# Altium PCB PCB_ASA.PcbDoc
Units mil, origin at the board's own origin, x right, y up, seen from the top; angles counter-clockwise.
Board outline 3897.64 x 3857.88 mil, 2 copper layers (Top Layer, Bottom Layer), stack 65.792 mil thick; 59 components, 102 nets, 331 pads, 160 vias.
Unrouted connection lines stored in the file: 1.
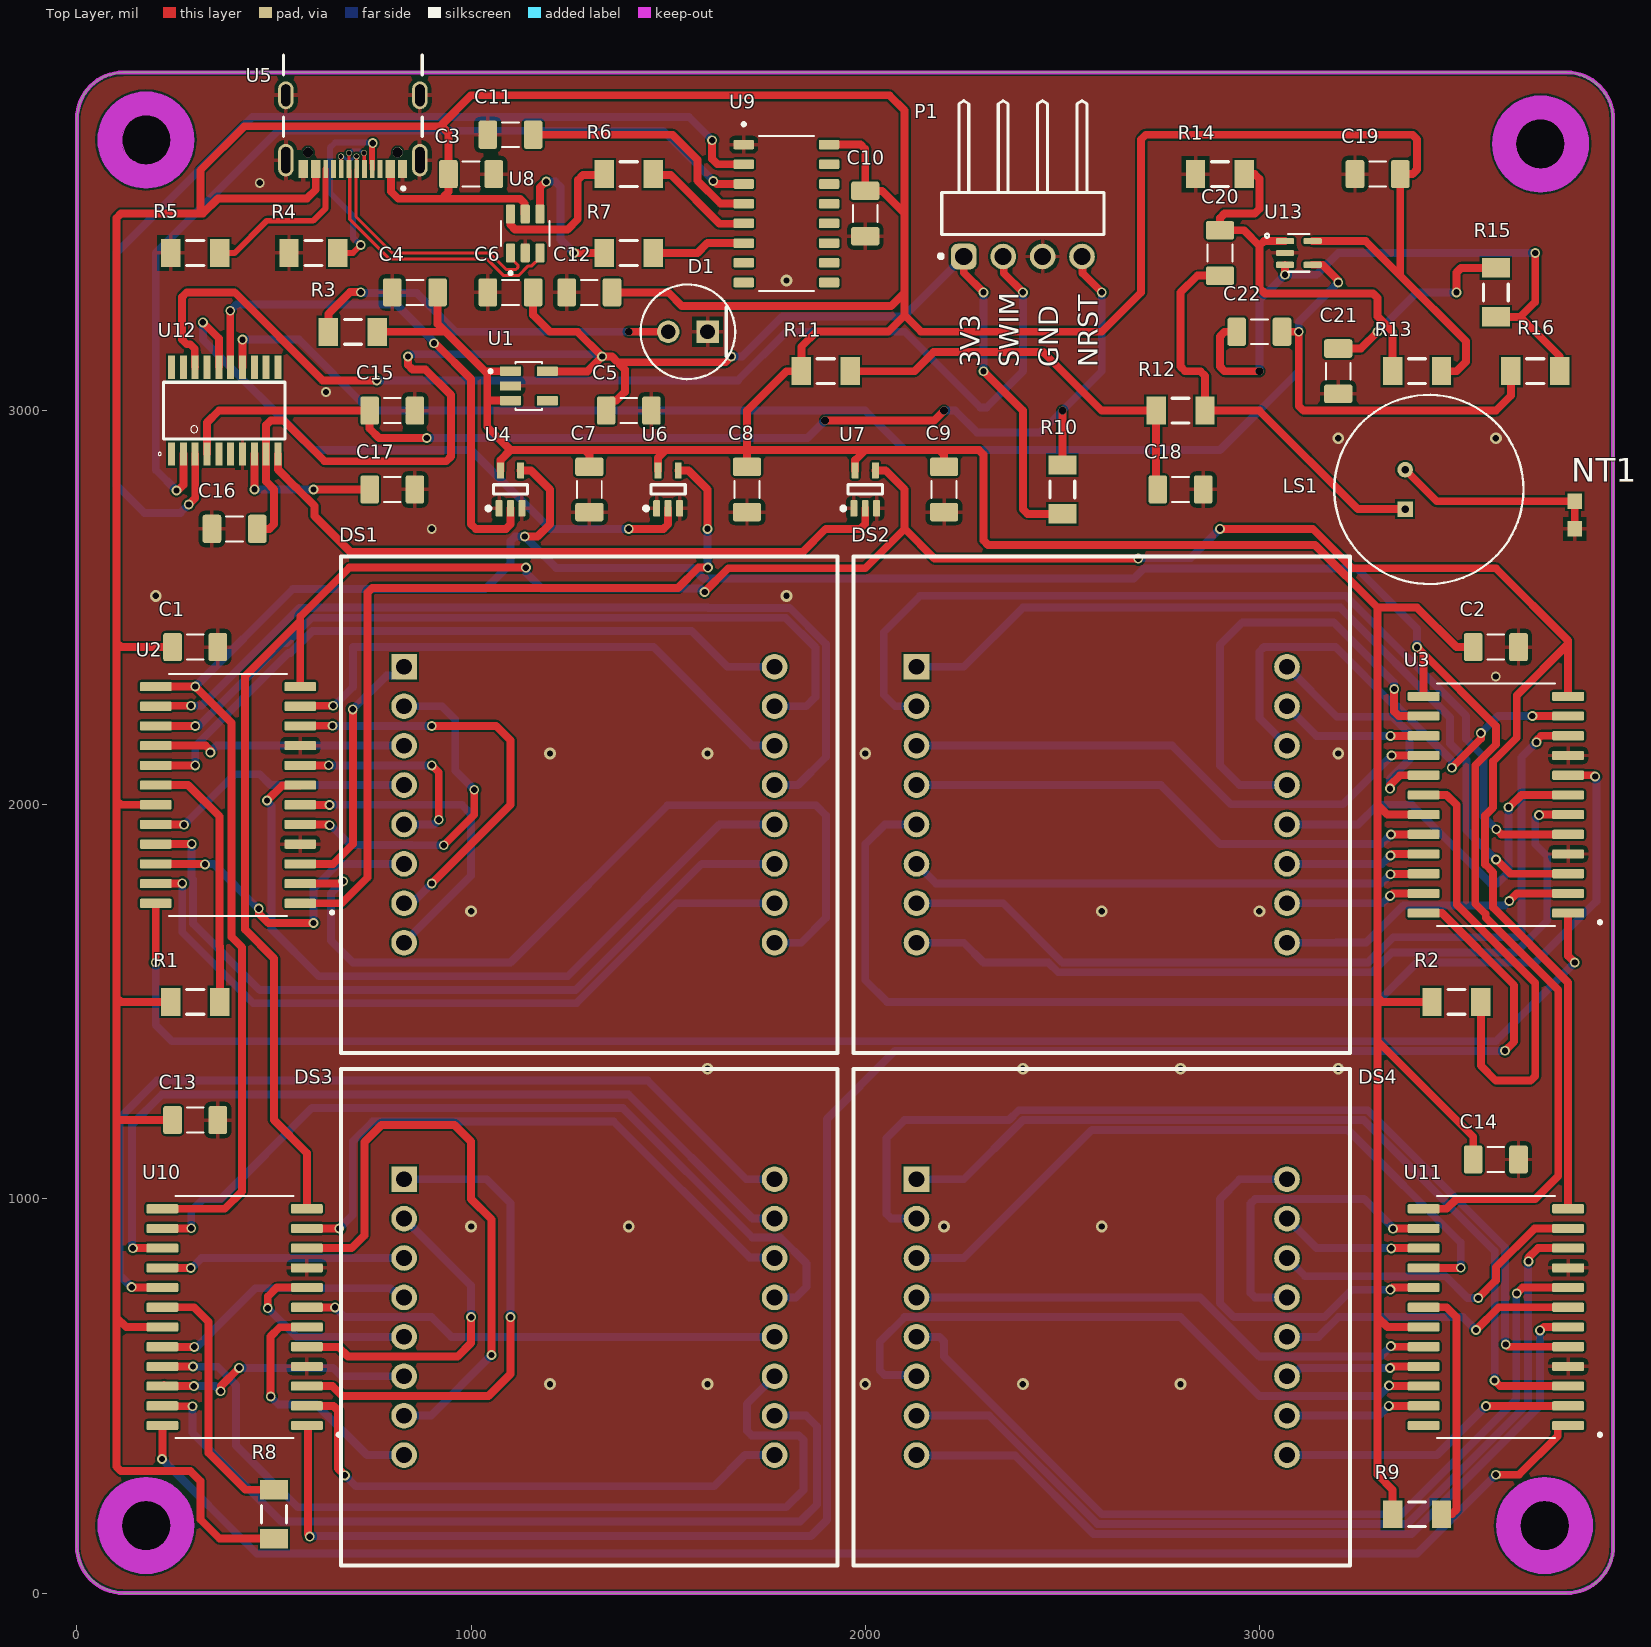
[diagram p0: Top Layer view]
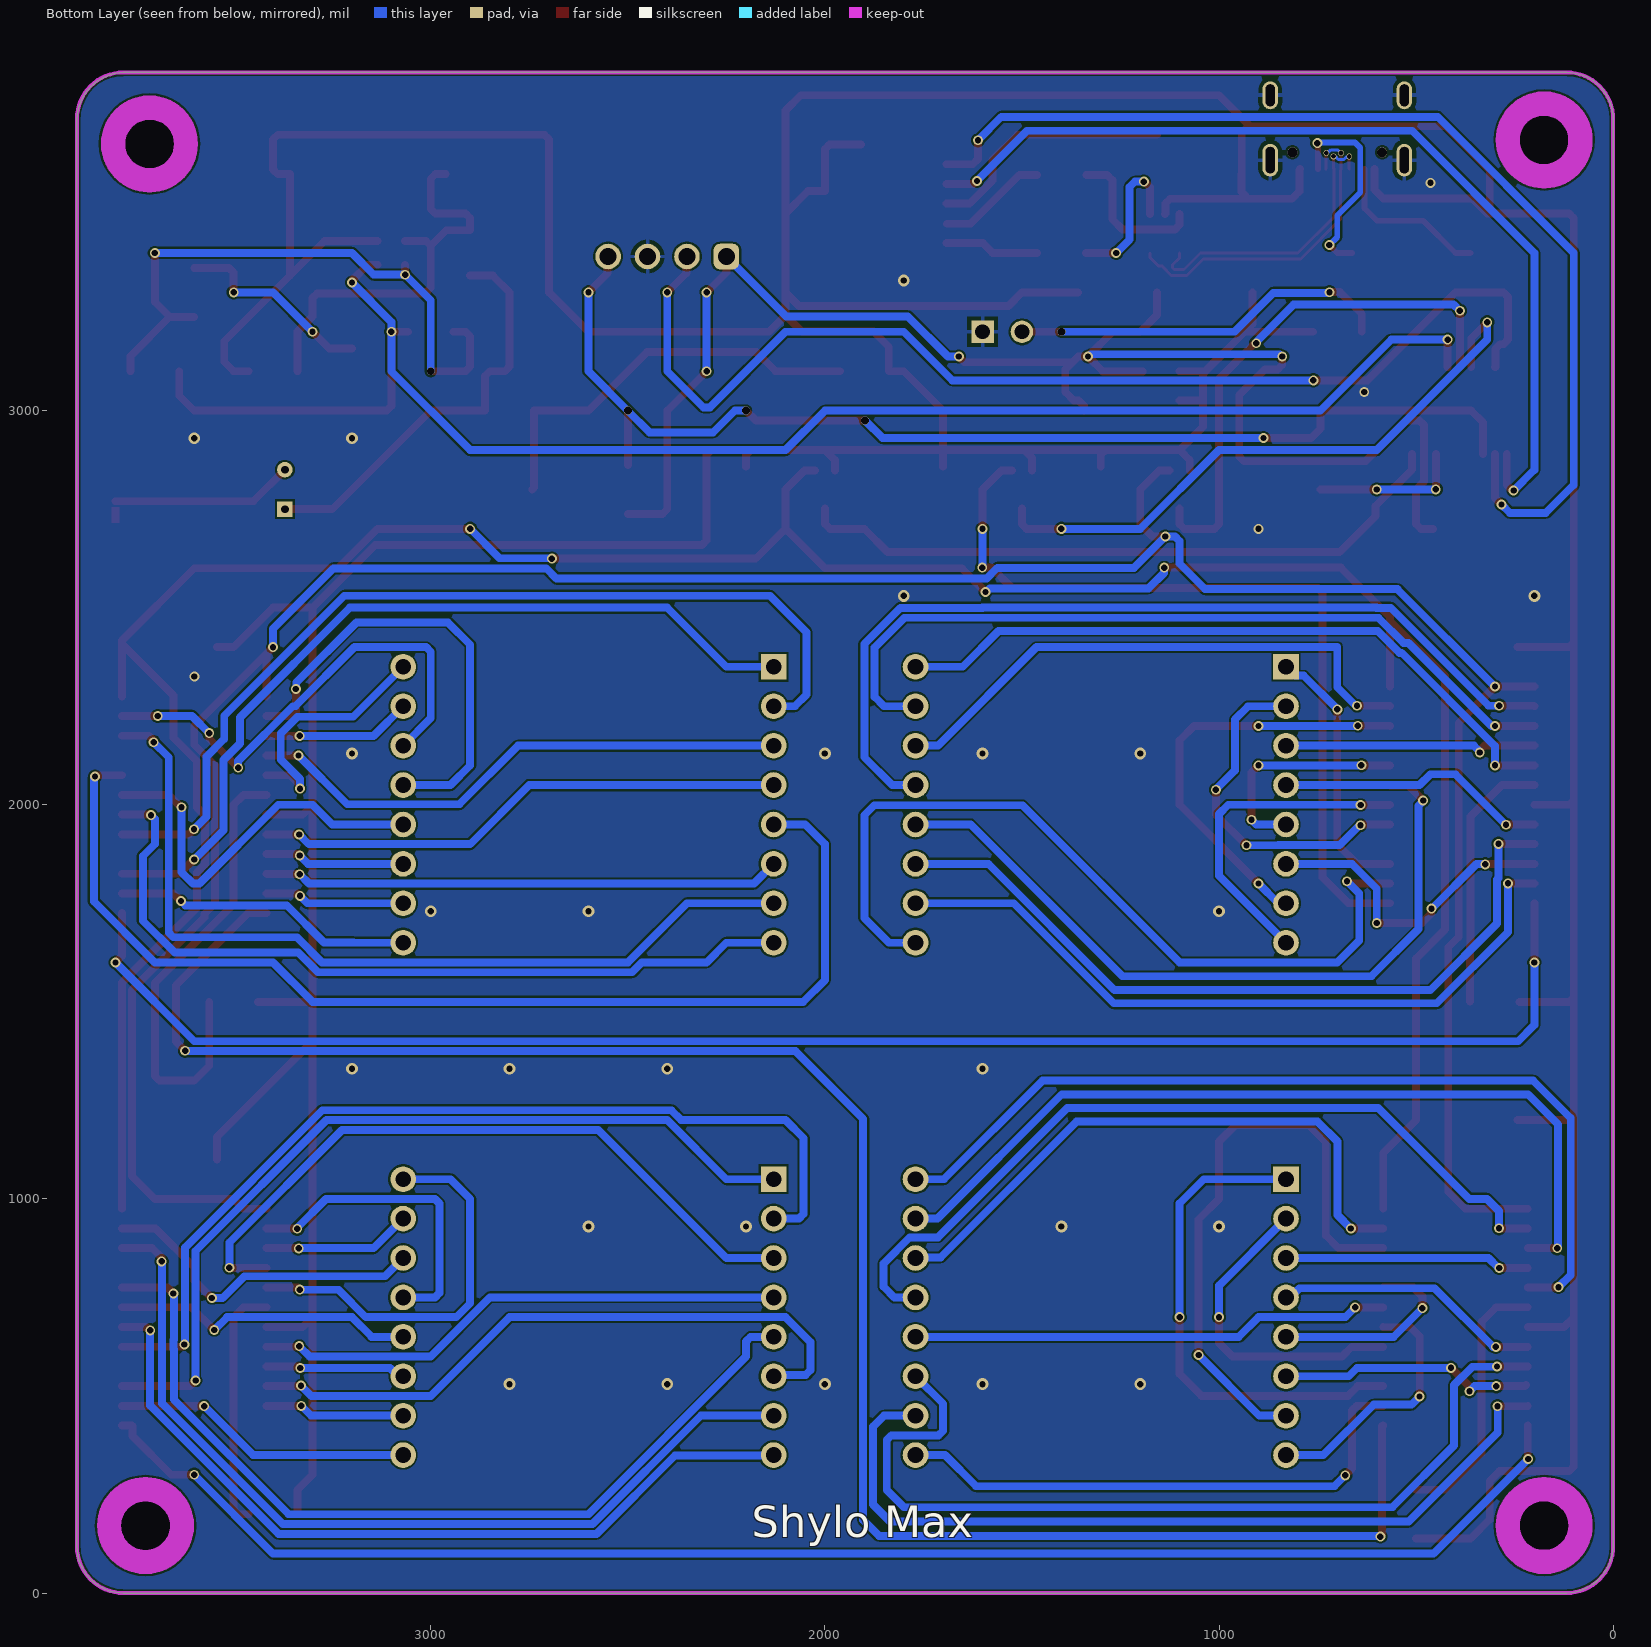
[diagram p1: Bottom Layer view, seen from below]
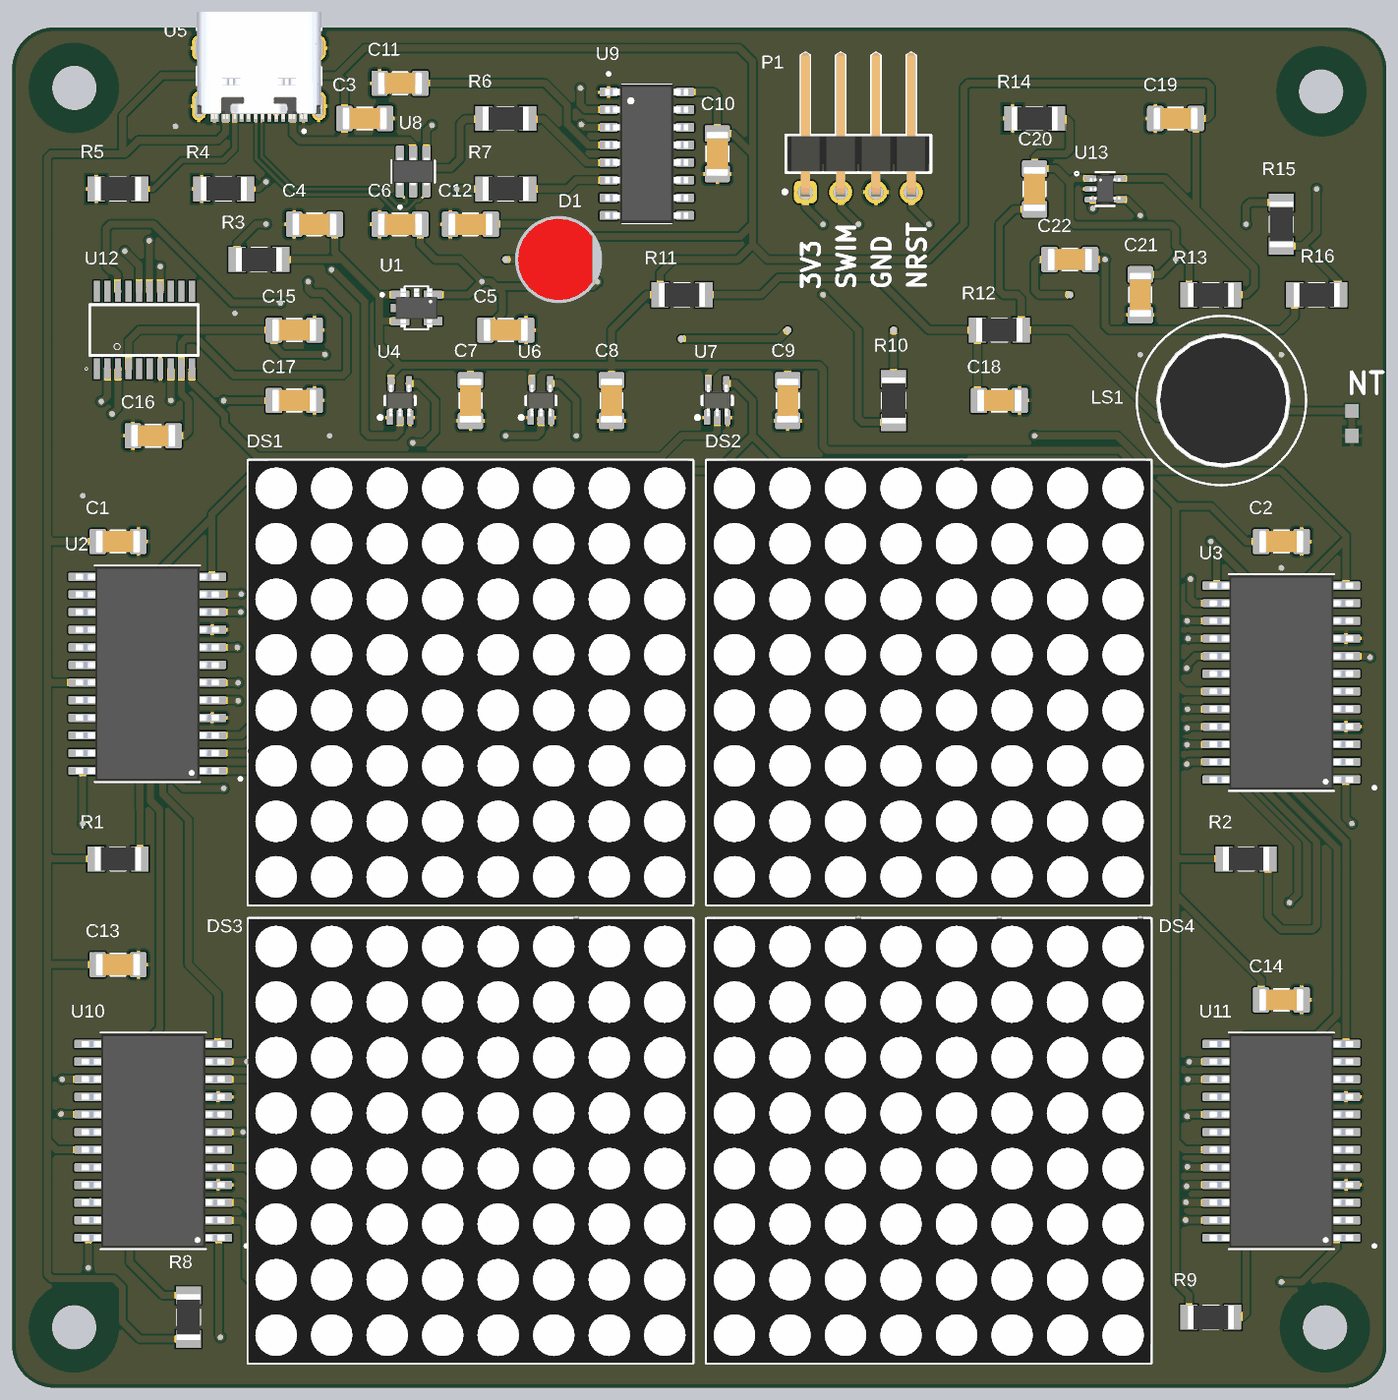
[diagram p2: 3D render of the assembled board from above, using the file's embedded part models]

## Layer stack, top to bottom
Top Solder: solder mask 0.0102, Solder Resist, Dk 3.5
Top Layer: signal copper 1.4
Dielectric 1: dielectric 62.9921, FR-4, Dk 4.8
Bottom Layer: signal copper 1.4
Bottom Solder: solder mask 0.0102, Solder Resist, Dk 3.5

## Board outline
0,118.11 0,3739.77 cw(c118.11,3739.77) 118.11,3857.88 3779.53,3857.88 cw(c3776.58,3736.82) 3897.64,3739.77 3897.64,118.11 cw(c3779.55,118.09) 3779.53,0 118.11,0 cw(c121.06,121.06)
cut-out: 3660.9,170.8 ccw(c3723.89,170.8) 3723.89,107.81 ccw(c3723.89,170.8) 3786.89,170.8 ccw(c3723.89,170.8) 3723.89,233.8 ccw(c3723.89,170.8)
cut-out: 113.44,3686.63 ccw(c176.43,3686.63) 176.43,3623.63 ccw(c176.43,3686.63) 239.42,3686.63 ccw(c176.43,3686.63) 176.43,3749.62 ccw(c176.43,3686.63)
cut-out: 112.9,171.2 ccw(c175.89,171.2) 175.89,108.21 ccw(c175.89,171.2) 238.89,171.2 ccw(c175.89,171.2) 175.89,234.19 ccw(c175.89,171.2)
cut-out: 3649.55,3676.46 ccw(c3712.54,3676.46) 3712.54,3613.47 ccw(c3712.54,3676.46) 3775.53,3676.46 ccw(c3712.54,3676.46) 3712.54,3739.45 ccw(c3712.54,3676.46)

## Design rules (kind name [scope] priority, off if disabled: settings)
Clearance [All] p1: gap=5 ignorepadtopadclearanceinfootprint=FALSE
DiffPairsRouting DiffPairsRouting_1 [All] p1: maxlimit=7.87 minlimit=7.87 mostfreqgap=7.87 toplayer_minwidth=7.87 toplayer_maxwidth=7.87 toplayer_prefwidth=7.87 bottomlayer_minwidth=7.87 bottomlayer_maxwidth=7.87 bottomlayer_prefwidth=7.87 maxuncoupledlength=500
HoleSize [All] p1: absolutevalues=TRUE maxlimit=200 minlimit=1 maxpercent=80.000 minpercent=20.000
HoleToHoleClearance [All] p1: gap=1 allowstackedmicrovias=TRUE
MinimumSolderMaskSliver [All] p1: minsoldermaskwidth=1
PolygonConnect PolygonConnect_GND [IsVia AND NOT IsComponent] p1: connectstyle=Direct reliefconductorwidth=10 reliefentries=4 polygonreliefangle="90 Angle" airgapwidth=10
PolygonConnect PolygonConnect_1 [All] p2: connectstyle=Relief reliefconductorwidth=10 reliefentries=4 polygonreliefangle="90 Angle" airgapwidth=10
RoutingVias [All] p1: holewidth=20 width=20 viastyle="Through Hole" minholewidth=10 minwidth=10 maxholewidth=50 maxwidth=50
SilkToSolderMaskClearance [IsPad] p1: minsilkscreentomaskgap=1 clearancetoexposedcopper=TRUE
SolderMaskExpansion [All] p1: expansion=4 istentingtop=FALSE
SupplyNets "Schematic Supply Nets" [InNet('GNDA')] p1: voltage=0.000
SupplyNets "Schematic Supply Nets_3" [InNet('5V')] p2: voltage=0.000
SupplyNets "Schematic Supply Nets_2" [InNet('GND')] p3: voltage=0.000
SupplyNets "Schematic Supply Nets_1" [InNet('3V3')] p4: voltage=0.000
Width [All] p1: maxlimit=100 minlimit=10 preferedwidth=50 minimp=50.000000 maximp=50.000000 favimp=50.000000
25 further rules are at their usual default settings.

## Classes and differential pairs
differential pair D: +D_P -D_N

## Components (designator, comment, footprint, x,y, rotation, side; value= is the part's Value field where it differs from the comment)
C1 "Cap_1206" Cap_1206 300,2400 r180 top value=100n
C2 "Cap_1206" Cap_1206 3600,2400 r180 top value=100n
C3 "Cap_1206" Cap_1206 1000,3600 r180 top value=10u
C4 "Cap_1206" Cap_1206 857.48,3300 r0 top value=1u
C5 "Cap_1206" Cap_1206 1400,3000 r180 top value=10u
C6 "Cap_1206" Cap_1206 1100,3300 r0 top value=1u
C7 "Cap_1206" Cap_1206 1300,2800 r270 top value=100n
C8 "Cap_1206" Cap_1206 1700,2800 r270 top value=100n
C9 "Cap_1206" Cap_1206 2200,2800 r270 top value=100n
C10 "Cap_1206" Cap_1206 2000,3500 r90 top value=100n
C11 "Cap_1206" Cap_1206 1100,3700 r180 top value=100n
C12 "Cap_1206" Cap_1206 1300,3300 r0 top value=100n
C13 "Cap_1206" Cap_1206 300,1200 r180 top value=100n
C14 "Cap_1206" Cap_1206 3600,1100 r180 top value=100n
C15 "Cap_1206" Cap_1206 800,3000 r180 top value=1u
C16 "1u" Cap_1206 400,2700 r0 top
C17 "Cap_1206" Cap_1206 800,2800 r0 top value=2.2u
C18 "Cap_1206" Cap_1206 2800,2800 r180 top value=100n
C19 "Cap_1206" Cap_1206 3300,3600 r180 top value=100n
C20 "Cap_1206" Cap_1206 2900,3400 r270 top value=10n
C21 "Cap_1206" Cap_1206 3200,3100 r270 top value=1u
C22 "Cap_1206" Cap_1206 3000,3200 r180 top value=100p
D1 "Led_Red" Led_Red 1550,3200 r180 top
DS1 "1088AS" LED_MATRIX_8x8_1088AS 1300,2000 r0 top
DS2 "1088AS" LED_MATRIX_8x8_1088AS 2600,2000 r0 top
DS3 "1088AS" LED_MATRIX_8x8_1088AS 1300,700 r0 top
DS4 "1088AS" LED_MATRIX_8x8_1088AS 2600,700 r0 top
LS1 "Micro" Micro 3400,2800 r90 top
NT1 "NETTIE_SMD" NETTIE_SMD 3800,2735 r90 top net-tie
P1 "61300411021" 61300411021 2400,3500 r180 top
R1 "Res_1206" Res_1206 300,1500 r0 top value=10k
R2 "Res_1206" Res_1206 3500,1500 r0 top value=10k
R3 "Res_1206" Res_1206 700,3200 r180 top value=2k
R4 "Res_1206" Res_1206 600,3400 r0 top value=5.1k
R5 "Res_1206" Res_1206 300,3400 r0 top value=5.1k
R6 "Res_1206" Res_1206 1400,3600 r0 top value=22
R7 "Res_1206" Res_1206 1400,3400 r0 top value=22
R8 "Res_1206" Res_1206 500,200 r90 top value=10k
R9 "Res_1206" Res_1206 3400,200 r0 top value=10k
R10 "Res_1206" Res_1206 2500,2800 r270 top value=10k
R11 "Res_1206" Res_1206 1900,3100 r0 top value=2k
R12 "Res_1206" Res_1206 2800,3000 r0 top value=2k
R13 "Res_1206" Res_1206 3400,3100 r180 top value=1M
R14 "Res_1206" Res_1206 2900,3600 r180 top value=1M
R15 "Res_1206" Res_1206 3600,3300 r90 top value=10k
R16 "Res_1206" Res_1206 3700,3100 r180 top value=100k
U1 "AP2112K-3.3TRG1" AP2112K-3.3TRG1 1146.65,3062.6 r0 top
U2 "MAX7219" MAX7219 383.27,2025 r180 top
U3 "MAX7219" MAX7219 3600,2000 r180 top
U4 "CAHCT1G125QDCKRG4Q" DCK0005A_M 1100,2800 r90 top
U5 "USB Type C" "USB Type C" 700,3800 r180 top
U6 "CAHCT1G125QDCKRG4Q" DCK0005A_M 1500,2800 r90 top
U7 "CAHCT1G125QDCKRG4Q" DCK0005A_M 2000,2800 r90 top
U8 "ESD USBLC6-2SC6" "ESD USBLC6-2SC6" 1137.4,3449.41 r90 top
U9 "CH340C" CH340C 1800,3500 r0 top
U10 "MAX7219" MAX7219 400,700 r180 top
U11 "MAX7219" MAX7219 3600,700 r180 top
U12 "STM8S103F3P6" STM8S103F3P6 400,3000 r90 top
U13 "MAX4466" MAX4466 3100,3400 r0 top

## Footprints (in the part's own frame and the unit in brackets; to place one, negate y for a bottom-side part, rotate by r counter-clockwise, add the part's x,y. Pads: shape width x height; smd on the part's side, far side on the other; paste and mask are expansions set on the pad)
61300411021 [mm] "Pin Header, pitch 2.54 mm, THT, Angled, single row, 4p"
  rrect50% 1.65x1.65 hole 1.1: 1(3.81,2.77)
  round 1.65 hole 1.1: 2(1.27,2.77) 3(-1.27,2.77) 4(-3.81,2.77)
  silkscreen extent -5.23,-7.27 5.41,2.87, body extent -5.08,-7.27 5.08,3.09, height 2.58
AP2112K-3.3TRG1 [mm]
  rrect15% 1.35x0.6 smd: 1(-1.185,0.95) 2(-1.185,0) 3(-1.185,-0.95) 4(1.185,-0.95) 5(1.185,0.95)
  silkscreen extent -2.57,-1.55 0.85,1.55, body extent -1.5,-1.4 1.5,1.4, height 1.4
Cap_1206 [mm]
  rrect25% 1.2x1.82 smd: 1(-1.46,0) 2(1.46,0)
  silkscreen extent -0.54,-0.8 0.54,0.8, body extent -1.6,-0.8 1.6,0.8, height 1.8
CH340C [mm]
  rrect25% 1.31x0.62 smd: 1(-2.75,4.445) 2(-2.75,3.175) 3(-2.75,1.905) 4(-2.75,0.635) 5(-2.75,-0.635) 6(-2.75,-1.905) 7(-2.75,-3.175) 8(-2.75,-4.445) 9(2.75,-4.445) 10(2.75,-3.175) 11(2.75,-1.905) 12(2.75,-0.635) 13(2.75,0.635) 14(2.75,1.905) 15(2.75,3.175) 16(2.75,4.445)
  silkscreen extent -2.85,-5 1.78,5.85, body extent -3,-5 3,5, height 1.8
DCK0005A_M [mm] "SOT23, 5-Leads, Body 2.15x1.4mm, Pitch 0.65mm, IPC Low Density"
  rrect22% 1.05x0.45 smd: 1(-1.219,0.737) 2(-1.219,0) 3(-1.219,-0.737) 4(1.225,-0.65) 5(1.225,0.65)
  silkscreen extent -1.35,-1.1 0.3,1.55, body extent -1.14,-1 1.14,1, height 0.94
"ESD USBLC6-2SC6" [mm]
  rrect25% 1.21x0.59 smd: 1(-1.255,0.95) 2(-1.255,0) 3(-1.255,-0.95) 4(1.255,-0.95) 5(1.255,0) 6(1.255,0.95)
  silkscreen extent -2.65,-1.57 0.81,1.57, body extent -1.4,-1.46 1.4,1.46, height 0.4
LED_MATRIX_8x8_1088AS [mil]
  rect 65x65 hole 40: 1(-470,350)
  round 65 hole 40: 2(-470,250) 3(-470,150) 4(-470,50) 5(-470,-50) 6(-470,-150) 7(-470,-250) 8(-470,-350) 9(470,-350) 10(470,-250) 11(470,-150) 12(470,-50) 13(470,50) 14(470,150) 15(470,250) 16(470,350)
  silkscreen extent -630,-630 630,630, body extent -630,-630 630,630, height 315
Led_Red [mm]
  rect 1.45x1.45 hole 0.95 paste-2539.97 mask+0: 1(-1.27,0)
  round 1.45 hole 0.95 paste-2539.97 mask+0: 2(1.27,0)
  silkscreen extent -3.05,-3.05 3.05,3.05, body extent -3.15,-3.15 3.15,3.15, height 0.25
MAX4466 [mm]
  rrect50% 1.19x0.4 smd: 1(-0.889,0.762) 2(-0.889,0) 3(-0.889,-0.762) 4(0.889,-0.762) 5(0.889,0.762)
  silkscreen extent -2.17,-1.22 0.68,1.24, body extent -1.1,-1 1.1,1, height 1.1
MAX7219 [mm]
  rrect25% 2.05x0.59 smd: 1(-4.655,6.985) 2(-4.655,5.715) 3(-4.655,4.445) 4(-4.655,3.175) 5(-4.655,1.905) 6(-4.655,0.635) 7(-4.655,-0.635) 8(-4.655,-1.905) 9(-4.655,-3.175) 10(-4.655,-4.445) 11(-4.655,-5.715) 12(-4.655,-6.985) 13(4.655,-6.985) 14(4.655,-5.715) 15(4.655,-4.445) 16(4.655,-3.175) 17(4.655,-1.905) 18(4.655,-0.635) 19(4.655,0.635) 20(4.655,1.905) 21(4.655,3.175) 22(4.655,4.445) 23(4.655,5.715) 24(4.655,6.985)
  silkscreen extent -6.81,-7.8 3.8,7.8, body extent -5.16,-7.7 5.16,7.7, height 2.65
Micro [mm]
  rect 1x1 hole 0.5 paste-2539.97 mask+0: 1(-1.27,0.762)
  round 1 hole 0.5 paste-2539.97 mask+0: 2(1.27,0.762)
  silkscreen extent -6.1,-6.86 6.1,5.33, body extent -4.85,-5.74 4.85,3.96, height 5.18
NETTIE_SMD [mil]
  rect 39.37x37.49 smd paste+0 mask+0: 1(-35,0) 2(35,0)
  Top Layer region: -20,-10 20,-10 20,10 -20,10
Res_1206 [mm] "Chip Resistor, 2-Leads, Body 3,20x1,60mm, IPC Low Density"
  rect 1.25x1.8 smd: 1(-1.575,0) 2(1.575,0)
  silkscreen extent -0.55,-0.8 0.55,0.8, body extent -1.65,-0.85 1.65,0.85, height 0.65
STM8S103F3P6 [mm]
  rect 1.5x0.45 smd: 1(-2.794,4.064) 2(-2.794,3.302) 3(-2.794,2.54) 4(-2.794,1.778) 5(-2.794,1.016) 6(-2.794,0.254) 7(-2.794,-0.508) 8(-2.794,-1.27) 9(-2.794,-2.032) 10(-2.794,-2.794) 11(2.794,-2.794) 12(2.794,-2.032) 13(2.794,-1.27) 14(2.794,-0.508) 15(2.794,0.254) 16(2.794,1.016) 17(2.794,1.778) 18(2.794,2.54) 19(2.794,3.302) 20(2.794,4.064)
  silkscreen extent -2.89,-3.25 1.82,4.93, body extent -3.2,-3.25 3.2,4.57, height 0.25
"USB Type C" [mm]
  rect 0.6x1.15 smd mask+0.047: A1_B12(-3.2,4.755) B1_A12(3.2,4.755)
  rect 0.6x1.15 smd mask+0.05: A4_B9(-2.4,4.755) B4_A9(2.4,4.755)
  rect 0.3x1.15 smd mask+0.05: A5(-1.25,4.755) A6(-0.25,4.755) A7(0.25,4.755) A8(1.25,4.755) B5(1.75,4.755) B6(0.75,4.755) B7(-0.75,4.755) B8(-1.75,4.755)
  oval 1x2.1 hole 0.6 slot 1.7 at 90 deg: SH1(-4.32,4.18) SH2(4.32,4.18)
  oval 1x1.8 hole 0.6 slot 1.4 at 90 deg: SH3(-4.32,0) SH4(4.32,0)
  round 0.65 hole 0.65 unplated: ""(-2.89,3.68) ""(2.89,3.68)
  silkscreen extent -4.47,-2.6 4.47,6.1, body extent -4.47,-2.6 4.47,5.11, height 3.31

## Part data
C16: library part Cap_1206
P1: library part CMP-1502-01063-4, "THT Angled Pin Header WR-PHD, Pitch 2.54 mm, Single Row, 4 pins", Color=Black, Contact Resistance=20mΩ, Current Rating=3A, Operating Supply Voltage=250V, Connector Type="Male Pin", Contact Material=Copper, Contact Mating Length=5.9944mm, Contact Plating=Gold, Gender=Male, Lead Pitch=2.54mm, Mount="Through Hole", Number of Contacts=4, Number of Pins=4, Number of Positions=4, Number of Rows=1, Pitch=2.54mm, RoHS=Compliant, Termination=Solder
U4 U6 U7: library part CMP-0859-00347-3, F @ Nom Voltage(Max)(Mhz)=75, Generic Part Number=SN74AHCT1G125-Q1, ICC @ Nom Voltage(Max)(mA)=0.01, Manufacturer="Texas Instruments", Operating Temperature Range(C)="-40 to 125", Rating=Automotive, tpd @ Nom Voltage(Max)(ns)=6, Voltage(Nom)(V)=5, 3-State Output=Yes, Bits(#)=1, DatasheetVersion=SCLS504B, Input Type=CMOS, Logic=True, Output Drive (IOL/IOH)(Max)(mA)=8/-8, Output Type=CMOS, PackageReference=DCK0005A, Schmitt Trigger=No, Sub-Family="Non-Inverting Buffer/Driver", Technology Family=AHCT, VCC(Max)(V)=5.5, VCC(Min)(V)=3

## Via types
v1: diameter 25, hole 16, Top Layer to Bottom Layer, tented both sides, 126 vias
v2: diameter 30, hole 16, Top Layer to Bottom Layer, tented both sides, 25 vias
v3: diameter 20, hole 20, Top Layer to Bottom Layer, 5 vias
v4: diameter 15, hole 12, Top Layer to Bottom Layer, tented both sides, 4 vias

## Nets (pads, with @x,y where several pads share a name; then routed paths per layer and width w, separated by ;. In a path a pad name is that pad's centre, name@x,y a point inside that pad or via, vN(x,y) a via of type N, cw(c..) or ccw(c..) an arc to the next point about the centre after c; other vN are vias at no path point)
3V3: C5.2 C6.2 C16.2 P1.1 R10.2 U1.5 U12.9 | length 4075.1
  Top Layer w20: C16.2 488.28,2700 500,2711.72 500,2800 480,2820 U12.9 480,2963.28 491.72,2975 525,2975 628.36,2871.64 937.06,2871.64 948.78,2883.36 948.78,3039.63 883.93,3104.48 851.21,3104.48 839.5,3116.2 839.5,3137.09 v1(839.72,3137.32) ; C6.2 1157.48,3242.52 1200,3200 1269.5,3200 v1(1332.42,3137.07) ; U1.5@1193.69,3099.62 1294.97,3099.62 v1(1332.42,3137.07) ; C5.2 1342.52,3012.2 1356.14,3025.83 1368.35,3025.83 1390.15,3047.63 1390.15,3104.19 1371.55,3122.79 ; v1(1660.18,3137.07) 1645.9,3122.79 1371.55,3122.79 ; P1.1 2250,3350 v1(2300,3300) ; v1(2300,3100) 2400,3000 2400,2749.71 2411.72,2737.99 R10.2 ; v1(1332.42,3137.07) 1357.27,3137.07 1371.55,3122.79
  Bottom Layer w20: v1(839.72,3137.32) 841.08,3137.32 846.9,3143.14 1325,3143.14 1331.07,3137.07 v1(1332.42,3137.07) ; v1(1660.18,3137.07) 1687.82,3137.07 1789.71,3238.96 2098.01,3238.96 P1.1 ; v1(2300,3100) v1(2300,3300)
5V: C1.2 C2.2 C3.2 C4.2 C7.1 C8.1 C9.1 C10.2 C12.2 C13.2 C14.2 C19.1 R1.1 R2.1 R3.1 R8.1 R9.1 R11.1 R13.1 U1.1 U1.3 U2.19 U3.19 U4.5 U5.A4_B9 U5.B4_A9 U6.5 U7.5 U8.5 U9.16 U10.19 U11.19 U13.5 | length 19573.9
  Top Layer w20: U2.19 111.72,2000 100,2011.72 ; U10.19 125,675 100,700 ; R1.1 111.72,1500 100,1511.72 ; C13.2 100,1200 ; C1.2 111.72,2400 100,2411.72 ; R8.1 362.01,137.99 313.03,186.97 313.03,284.43 288.28,309.17 111.72,309.17 100,320.89 100,700 ; U5.B4_A9@605.76,3612.55 605.76,3560.69 583.27,3538.2 357.66,3538.2 319.46,3500 313.12,3500 ; R3.1 935.01,3200 ; U5.A4_B9 796.3,3610.98 796.3,3556.31 815.11,3537.51 929.32,3537.51 ; C4.2 914.96,3220.05 935.01,3200 ; 931.32,3537.51 1083.74,3537.51 1083.87,3537.64 1123.94,3537.64 1135.79,3525.79 1135.79,3500.43 U8.5 ; 935.48,3539.51 931.32,3543.67 943.03,3555.38 C3.2@943.03,3599.49 ; C3.2 942.52,3704.25 923.38,3723.38 ; U4.5 1074.41,2874.41 1100,2900 ; U1.3 1045.29,3025.2 1040.96,3029.52 ; U1.1 1040.96,3100 1040.96,3094.04 ; C7.1 1300,2888.28 1288.28,2900 ; C12.2 1500,3300 1534.33,3265.67 2065.67,3265.67 2100,3300 ; U6.5 1474.41,2880.27 1494.14,2900 ; C8.1 1700,2900 ; U9.16 1988.28,3675 2000,3663.28 C10.2 2042.52,3557.48 2100,3500 ; U7.5 1974.41,2874.41 2000,2900 ; C9.1 2200,2888.28 2188.28,2900 ; U13.5 3270,3430 3357.48,3342.52 ; R9.1 3337.99,262.01 3300,300 3300,700 ; U11.19 3325,675 3300,700 ; U3.19 3325,1975 3300,2000 ; R2.1 3311.72,1500 3300,1511.72 ; R13.1 3500,3100 3524.02,3124.02 3524.02,3175.98 3357.48,3342.52 ; C14.2 3542.52,1157.48 3300,1400 ; C2.2 3500,2400 3400,2500 3300,2500 ; 100,700 100,1200 ; 100,1200 100,1511.72 ; 100,1511.72 100,2011.72 ; 100,2011.72 100,2411.72 ; 100,2411.72 100,3488.28 111.72,3500 313.12,3500 ; 313.12,3500 313.12,3609.51 425.03,3721.42 921.42,3721.42 923.38,3723.38 ; 923.38,3723.38 1000,3800 2061.26,3800 2100,3761.26 2100,3500 ; 935.01,3200 1040.96,3094.04 ; 1040.96,3029.52 1040.96,3094.04 ; 1040.96,3029.52 1040.96,2959.04 1100,2900 ; 1100,2900 1288.28,2900 ; 1288.28,2900 1494.14,2900 ; 1494.14,2900 1700,2900 ; 1700,2900 1700,3000 1800,3100 R11.1 1837.99,3162.01 1876.24,3200.26 2058.37,3200.26 2100,3241.89 ; 1700,2900 2000,2900 ; 2000,2900 2188.28,2900 ; 2100,3241.89 2141.89,3200 2600,3200 2700,3300 2700,3688.28 2711.72,3700 3388.28,3700 3400,3688.28 3400,3611.72 3388.28,3600 C19.1 3357.48,3342.52 ; 2100,3241.89 2100,3300 ; 2100,3300 2100,3500 ; 2188.28,2900 2288.28,2900 2300,2888.28 2300,2670.87 2311.72,2659.16 3140.84,2659.16 3300,2500 ; 3300,700 3300,1400 ; 3300,1400 3300,1511.72 ; 3300,1511.72 3300,2000 ; 3300,2000 3300,2500
D_CH340C_N: R7.2 U9.6 | length 240.1
  Top Layer w20: R7.2 1574.31,3400 1599.31,3425 U9.6
D_CH340C_P: R6.2 U9.5 | length 280.2
  Top Layer w20: R6.2@1462.01,3598.17 1506.43,3598.17 1630.48,3474.13 U9.5@1690.86,3474.13
D_N: U5.A7 U5.B7 U8.3 | length 827.6
  Top Layer w7.87: v4(690.38,3653.37) 690.12,3653.1 690.12,3612.84 692.13,3610.83 692.13,3485.6 793.48,3384.25 1040.64,3384.25 1082.49,3342.4 1120.43,3342.4 1145.28,3367.24 1154.25,3367.24 1174.8,3387.8 U8.3 ; v4(728,3653.84) 729.01,3652.82 729.01,3613.31 U5.B7
  Bottom Layer w7.87: v4(690.38,3653.37) 691.36,3653.37 699.57,3661.58 716.28,3661.58 722.66,3655.2 726.64,3655.2 v4(728,3653.84)
D_P: U5.A6 U5.B6 U8.1 | length 745.4
  Top Layer w7.87: v4(669.62,3644.58) 670.05,3644.15 670.05,3613.22 U5.B6 ; v4(709.47,3645.14) 709.66,3644.95 709.66,3614.38 707.87,3612.6 707.87,3492.13 800,3400 1047.16,3400 1089.02,3358.14 1113.9,3358.14 1118.52,3362.76 1118.52,3369.28 1100,3387.8 U8.1
  Bottom Layer w7.87: v4(669.62,3644.58) 670.98,3643.22 677.29,3643.22 683.58,3636.93 697.19,3636.93 704.04,3643.78 708.11,3643.78 v4(709.47,3645.14)
DOUT: U3.24 U10.1 | length 4905.8
  Top Layer w20: U10.1 584.5,425 586.12,423.39 586.12,149.04 590.6,144.56 v1(590.6,143.21) ; U3.24@3416.91,1725.17 3463.15,1725.17 3646.41,1541.91 3646.41,1399.07 v1(3623.23,1375.88)
  Bottom Layer w20: v1(590.6,143.21) 591.56,144.16 595.09,144.16 595.92,144.99 1862.37,144.99 1902.92,185.54 1902.92,1202.92 2075,1375 3622.34,1375 v1(3623.23,1375.88)
GND: C1.1 C2.1 C3.1 C4.1 C5.1 C6.1 C7.2 C8.2 C9.2 C10.1 C11.2 C12.1 C13.1 C14.1 C15.1 C16.1 C17.2 C18.1 C19.2 C21.2 D1.1 NT1.1 P1.3 R4.1 R5.1 R14.2 U1.2 U2.4 U2.9 U3.4 U3.9 U4.1 U4.3 U5.A1_B12 U5.B1_A12 U5.SH1 U5.SH2 U5.SH3 U5.SH4 U6.1 U6.3 U7.1 U7.3 U8.2 U9.1 U10.4 U10.9 U11.4 U11.9 U12.7 U13.2
  other v1: 3599.83,2325.17 900,2700 631.73,3047.36 463.67,3577.81
  other v2: 1200,530 1600,530 2000,530 2400,530 2800,530 1000,930 1400,930 2200,930 2600,930 1600,1330 2400,1330 2800,1330 3200,1330 1000,1730 2600,1730 3000,1730 1200,2130 1600,2130 2000,2130 3200,2130 200,2530 1800,2530 3200,2930 3600,2930 1800,3330
GNDA: LS1.2 NT1.2 | length 463.1
  Top Layer w20: LS1.2 3450,2770 NT1.2
K1: DS1.9 U2.2 | length 2145.5
  Top Layer w20: U2.2 669.44,1800 v1(675.38,1805.93)
  Bottom Layer w20: v1(675.38,1805.93) 644.24,1774.79 644.24,1655.76 700,1600 1100,1600 1498.64,1998.64 1874.87,1998.64 1900,1973.51 1900,1712.71 1837.29,1650 DS1.9
K1_2: DS2.9 U3.2 | length 765
  Top Layer w20: v1(3633.89,1755.89) 3653,1775 U3.2
  Bottom Layer w20: DS2.9 3195.47,1650 3195.93,1650.47 3271.06,1650.47 3365.48,1744.88 3622.88,1744.88 v1(3633.89,1755.89)
K1_3: DS3.9 U10.2 | length 1389.6
  Top Layer w20: U10.2@583.63,474.63 650.82,474.63 662.54,462.92 662.54,315.89 v1(679.82,298.61)
  Bottom Layer w20: v1(679.82,298.61) 707.45,270.98 1616.18,270.98 1695.2,350 DS3.9
K1_4: DS4.9 U11.2 | length 765
  Top Layer w20: v1(3574.98,474.31) 3575.66,475 U11.2
  Bottom Layer w20: DS4.9 3450.66,350 v1(3574.98,474.31)
K2: DS1.14 U2.11 | length 1428.8
  Top Layer w20: U2.11 567.7,2251.17 v1(649.89,2251.17)
  Bottom Layer w20: v1(649.89,2251.17) 653.08,2251.17 700,2298.09 700,2400 1463.1,2400 1713.1,2150 DS1.14
K2_2: DS2.14 U3.11 | length 1255.9
  Top Layer w20: v1(3488.25,2093.86) 3561.98,2167.59 v1(3561.98,2181.64) ; v1(3692.59,2225.17) 3692.76,2225 U3.11
  Bottom Layer w20: DS2.14 3000,2220 3000,2388.28 3011.72,2400 3193.59,2400 3343.59,2250 3350,2250 3488.91,2111.09 3488.91,2094.52 v1(3488.25,2093.86) ; v1(3561.98,2181.64) 3605.52,2225.17 v1(3692.59,2225.17)
K2_3: DS3.14 U10.11 | length 1551.8
  Top Layer w20: U10.11 583.38,924.89 v1(665.63,924.89)
  Bottom Layer w20: v1(665.63,924.89) 699.68,958.93 699.68,1145.62 750.16,1196.1 1361.81,1196.1 1706.18,851.73 1768.28,851.73 DS3.14
K2_4: DS4.14 U11.11 | length 847.8
  Top Layer w20: v1(3555.33,748.63) 3600,793.3 3600,826.54 3698.46,925 U11.11
  Bottom Layer w20: DS4.14 3116.2,803.8 3472.73,803.8 3527.89,748.63 v1(3555.33,748.63)
K3: DS1.8 U2.6 | length 840.7
  Top Layer w20: U2.6 567.16,1999.37 v1(640.8,1999.37)
  Bottom Layer w20: v1(640.8,1999.37) 641.43,2000 976.59,2000 1000,1976.59 1000,1820 DS1.8
K3_2: DS2.8 U3.6 | length 2044.2
  Top Layer w20: v1(3709.83,1973.6) 3711.23,1975 U3.6
  Bottom Layer w20: DS2.8 2250,1650 2300,1600 2464.64,1600 2489.64,1575 3286.05,1575 3336.05,1625 3649.62,1625 3730.47,1705.85 3730.47,1869.53 3700,1900 3700,1963.77 v1(3709.83,1973.6)
K3_4: DS4.8 U11.6 | length 2063.3
  Top Layer w20: v1(3711.84,666.49) 3713.19,666.49 3721.7,675 U11.6
  Bottom Layer w20: DS4.8@2131.34,348.66 2380.63,348.66 2579.29,150 3385.81,150 3711.84,476.02 v1(3711.84,666.49)
K4: DS1.12 U2.7 | length 1916.8
  Top Layer w20: v1(482.2,2010.57) 520.02,2048.39 564.92,2048.39 U2.7
  Bottom Layer w20: v1(482.2,2010.57) 482.2,2009.22 493.81,1997.61 493.81,1684.54 613.52,1564.82 1244.91,1564.82 1630.08,1950 DS1.12
K4_2: DS2.12 U3.7 | length 1006.4
  Top Layer w20: v1(3632.21,1993.57) 3633.58,1993.57 3665.01,2025 U3.7
  Bottom Layer w20: DS2.12 3250,1950 3300,2000 3386.8,2000 3586.72,1800.07 3603.29,1800.07 3632.21,1828.99 v1(3632.21,1993.57)
K4_3: DS3.12 U10.7 | length 1217.8
  Top Layer w20: U10.7 583.45,724.82 v1(654.71,724.82)
  Bottom Layer w20: v1(654.71,724.82) 679.53,700 900,700 950,650 DS3.12
K4_4: DS4.12 U11.7 | length 771.5
  Top Layer w20: v1(3549.46,667.15) 3607.32,725 U11.7
  Bottom Layer w20: DS4.12 3150,650 3200,700 3516.61,700 v1(3549.46,667.15)
K5: DS1.1 U2.3 | length 671.4
  Top Layer w20: U2.3 650,1850 700,1900 700,2241.82 v1(699.72,2242.1)
  Bottom Layer w20: v1(699.72,2242.1) 785.13,2327.5 807.5,2327.5 DS1.1
K5_2: DS2.1 U3.3 | length 2137.2
  Top Layer w20: v1@3600.92,1861.05 3636.96,1825 U3.3
  Bottom Layer w20: DS2.1 2250,2350 2400,2500 3205.38,2500 3483.87,2221.51 3483.87,2155.52 3525.65,2113.75 3525.65,1935.4 v1@3600,1861.05
  other v1: 3600.23,1861.05
K5_3: DS3.1 U10.3 | length 1278.4
  Top Layer w20: U10.3@583.36,524.91 648.26,524.91 673.16,500 1044.17,500 1100,555.83 v1(1100,700)
  Bottom Layer w20: DS3.1 1038.83,1050 1100,988.83 v1(1100,700)
K5_4: DS4.1 U11.3 | length 2188.1
  Top Layer w20: v1(3596.51,539.43) 3610.93,525 U11.3
  Bottom Layer w20: DS4.1 2250,1050 2400,1200 3264.64,1200 3597.2,867.44 3597.2,540.12 v1(3596.51,539.43)
K6: DS1.7 U2.10 | length 1086
  Top Layer w20: U2.10 566.88,2200.34 v1(648.19,2200.34) ; v1(900,1800) 1100,2000 1100,2163.59 1063.59,2200 v1(900,2200)
  Bottom Layer w20: v1(648.19,2200.34) 648.53,2200 v1(900,2200) ; DS1.7 850,1750 v1(900,1800)
K6_2: DS2.7 U3.10 | length 2216.7
  Top Layer w20: v1(3703.18,2158.63) 3703.18,2163.28 3714.9,2175 U3.10
  Bottom Layer w20: DS2.7 2350,1750 2500,1600 3275.69,1600 3339.62,1663.93 3653.04,1663.93 3664.75,1675.64 3664.75,2120.2 v1(3703.18,2158.63)
K6_3: DS3.7 U10.10 | length 1551
  Top Layer w20: U10.10 696.66,875 729.27,907.61 729.27,1144.4 772.48,1187.61 957.85,1187.61 1000,1145.47 1000,1000 1051.81,948.19 v1(1051.81,603.8)
  Bottom Layer w20: DS3.7 898.02,450 v1(1051.81,603.8)
K6_4: DS4.7 U11.10 | length 2273.2
  Top Layer w20: v1(3682.8,841.46) 3682.8,851.15 3706.65,875 U11.10
  Bottom Layer w20: DS4.7 2314.64,450 2589.64,175 3375.46,175 3681.77,481.31 3681.77,840.42 v1(3682.8,841.46)
K7: DS1.2 U2.5 | length 900.8
  Top Layer w20: U2.5 639.19,1950 v1(641.07,1948.12) ; v1(930.46,1897.25) 1008.13,1974.93 v1(1008.13,2038.17)
  Bottom Layer w20: v1(641.07,1948.12) 643.82,1948.12 694.44,1897.5 849.68,1897.5 849.92,1897.25 v1(930.46,1897.25) ; DS1.2@830.06,2250.06 926.12,2250.06 959.93,2216.25 959.93,2087.06 1008.13,2038.86 v1(1008.13,2038.17)
K7_2: DS2.2 U3.5 | length 2402.5
  Top Layer w20: v1(3600.86,1937.71) 3613.57,1925 U3.5
  Bottom Layer w20: DS2.2 2076.23,2250 2046.9,2279.33 2046.9,2437.69 2139.38,2530.17 3219.29,2530.17 3523.94,2225.52 3523.94,2167.17 3568.95,2122.16 3568.95,1969.62 v1(3600.86,1937.71)
K7_3: DS3.2 U10.5 | length 827
  Top Layer w20: U10.5@583.62,624.65 663.11,624.65 687.76,600 965.87,600 1000,634.13 v1(1000,700)
  Bottom Layer w20: DS3.2 1000,780 v1(1000,700)
K7_4: DS4.2 U11.5 | length 2423.3
  Top Layer w20: v1(3625.21,630.53) 3630.74,625 U11.5
  Bottom Layer w20: DS4.2 2129.71,950.29 2065.72,950.29 2054,962 2054,1154 2100,1200 2364.64,1200 2389.64,1225 3275,1225 3623.59,876.41 3623.59,632.15 v1(3625.21,630.53)
K8: DS1.5 U2.8 | length 571.6
  Top Layer w20: U2.8 638.75,2100 v1(638.85,2100.1) ; v1(900,2100) 917.78,2082.22 v1(917.78,1962.06)
  Bottom Layer w20: v1(638.85,2100.1) 641.69,2100.1 641.79,2100 v1(900,2100) ; DS1.5 905.73,1950 v1(917.78,1962.06)
K8_2: DS2.5 U3.8 | length 2866.8
  Top Layer w20: U3.8 3848.33,2075 v1(3851.79,2071.53)
  Bottom Layer w20: DS2.5 2050,1950 2000,1900 2000,1555 2055,1500 3300,1500 3400,1600 3700,1600 3854.84,1754.84 3854.84,2068.49 v1(3851.79,2071.53)
K8_3: DS3.5 U10.8 | length 514
  Top Layer w20: v1(484.09,722.76) 484.09,752.05 507.04,775 U10.8
  Bottom Layer w20: v1(484.09,722.76) 556.85,650 DS3.5
K8_4: DS4.5 U11.8 | length 2257.8
  Top Layer w20: v1(3652.94,760.03) 3667.9,775 U11.8
  Bottom Layer w20: DS4.5 2188.28,650 2200,638.28 2200,600 2600,200 3360.53,200 3651.81,491.28 3651.81,618.24 3652.71,619.14 3652.71,641.92 3651.81,642.82 3651.81,755.37 3651.98,755.54 3651.98,759.08 v1(3652.94,760.03)
K33_3: DS3.8 U10.6 | length 655.3
  Top Layer w20: v1(491.56,498.46) 490.79,499.23 490.79,650.84 514.4,674.44 582.71,674.44 U10.6
  Bottom Layer w20: v1(491.56,498.46) 491.56,498.16 511.72,478 607.61,478 735.62,350 DS3.8
LOAD: U7.2 U12.10 | length 1700.1
  Top Layer w20: U12.10 510,2850.47 556.02,2804.45 556.66,2804.45 602.68,2758.43 602.68,2732.68 694.08,2641.27 1841.27,2641.27 1900,2700 1987.26,2700 2000,2712.74 U7.2
LOAD_H: U2.12 U3.12 U7.4 U10.12 U11.12 | length 7280.9
  Top Layer w20: U2.12 566.54,2466.54 ; U10.12 583.27,1116.73 500,1200 500,1610.18 426.71,1683.47 426.71,2326.71 566.54,2466.54 ; v1(1138.93,2601.66) 690.89,2601.66 566.54,2477.31 566.54,2466.54 ; v1(1592.43,2539.81) 1652.62,2600 2000,2600 2100,2700 ; U7.4 2051.77,2848.23 2100,2800 2100,2700 ; v1(2692.69,2624.36) 2175.64,2624.36 2100,2700 ; v1(2900,2700) 3135.36,2700 3235.36,2600 3600,2600 3783.27,2416.73 U3.12 ; U11.12 3783.27,1548.88 3593.09,1739.05 3593.09,1828.4 3572.71,1848.78 3572.71,1972.71 3593.09,1993.09 3593.09,2110.32 3652.88,2170.1 3652.88,2277.27 3783.27,2407.67
  Bottom Layer w20: v1(1138.93,2601.66) 1139.89,2600.71 1139.89,2588.22 1179.02,2549.09 1581.8,2549.09 1591.08,2539.81 v1(1592.43,2539.81) ; v1@2693.81,2625.48 2693.97,2625.31 2697.18,2625.31 2697.34,2625.48 2825.48,2625.48 v1(2900,2700)
Mic_OUT: C22.1 R16.2 U12.14 U13.4 | length 4153.2
  Top Layer w20: U12.14 v1(420,3180) ; C22.1 v1(3100,3200) 3100,3011.72 3111.72,3000 3600,3000 3637.99,3037.99 R16.2 ; U13.4 3160,3370 3200,3330 v1(3200,3324.87)
  Bottom Layer w20: v1(420,3180) 563.09,3180 743.09,3000 2000,3000 2100,2900 2900,2900 3100,3100 v1(3100,3200) 3100,3224.87 v1(3200,3324.87)
MOSI: U6.2 U12.16 | length 1598.8
  Top Layer w20: v1(319.37,3223.89) 360,3183.26 U12.16 ; v1(1400,2700) 1488.28,2700 1500,2711.72 U6.2
  Bottom Layer w20: v1(319.37,3223.89) 319.37,3180.63 600,2900 1000,2900 1200,2700 v1(1400,2700)
MOSI_H: U2.1 U6.4 | length 2103.3
  Top Layer w20: U2.1 671.63,1750 737.56,1815.92 737.56,2538.4 749.27,2550.11 1525.11,2550.11 1576.59,2601.59 v1(1600.76,2601.59) ; U6.4 1551.77,2848.23 1600,2800 v1(1600,2700)
  Bottom Layer w20: v1(1600,2700) 1600,2602.35 v1(1600.76,2601.59)
NetC11_1: C11.1 U9.4 | length 637.7
  Top Layer w20: C11.1 1510.99,3700 1574.66,3636.34 1574.66,3583.4 1633.06,3525 U9.4
NetC17_1: C17.1 U12.8 | length 382.2
  Top Layer w20: U12.8 450,2800.56 v1(450.29,2800.27) ; v1(600,2800) C17.1
  Bottom Layer w20: v1(450.29,2800.27) 450.56,2800 v1(600,2800)
NetC18_2: C18.2 R11.2 R12.1 | length 1059.4
  Top Layer w20: R11.2 2125,3100 2173.43,3148.43 2451.57,3148.43 2600,3000 R12.1 2737.99,2804.53 C18.2
NetC20_1: C20.1 R13.2 R14.1 U13.1 | length 1064.8
  Top Layer w20: R14.1 2988.28,3600 3000,3588.28 3000,3511.72 2988.28,3500 2911.72,3500 2900,3488.28 C20.1 2960.8,3457.48 3000,3418.28 ; U13.1 3011.72,3430 3000,3418.28 ; R13.2 3337.99,3200.9 3300,3238.89 3300,3285.66 3288.28,3297.37 3014.34,3297.37 3000,3311.72 3000,3418.28
NetC20_2: C20.2 LS1.1 R12.2 | length 1077.4
  Top Layer w20: C20.2 2842.52,3342.52 2800,3300 2800,3111.72 2811.72,3100 2850.29,3100 2862.01,3088.28 R12.2 3000,3000 3250,2750 LS1.1
NetC21_1: C21.1 R15.2 | length 514.2
  Top Layer w20: C21.1 3257.48,3157.48 v1(3300,3200) ; v1(3500,3300) 3500,3350.29 3511.72,3362.01 R15.2
  Bottom Layer w20: v1(3300,3200) 3400,3300 v1(3500,3300)
NetC22_2: C22.2 R15.1 R16.1 U13.3 | length 1602.7
  Top Layer w20: C22.2 2911.72,3200 2900,3188.28 2900,3111.72 2911.72,3100 v3(3000,3100) ; v1(3065,3344.87) U13.3 ; R15.1 3662.01,3237.99 ; v1(3700,3400) 3700,3275.98 3662.01,3237.99 ; R16.1 3762.01,3137.99 3662.01,3237.99
  Bottom Layer w20: v3(3000,3100) 3000,3279.87 v1(3065,3344.87) 3144.87,3344.87 3200,3400 v1(3700,3400)
NetD1_2: D1.2 R3.2 | length 971.8
  Top Layer w20: R3.2 637.99,3245.43 693.02,3300.46 v1(719.94,3300.46) ; v3(1400,3200) D1.2
  Bottom Layer w20: v1(719.94,3300.46) 721.79,3298.61 862.36,3298.61 960.97,3200 v3(1400,3200)
NetR1_2: R1.2 U2.18 | length 664.7
  Top Layer w20: U2.18 281.99,2050 362.01,1969.99 362.01,1641.86 362.79,1641.07 R1.2@362.79,1500.79
NetR2_2: R2.2 U3.18 | length 1185.3
  Top Layer w20: U3.18 3475,2025 3500.85,1999.15 3500.85,1746.79 3700,1547.63 3700,1311.72 3688.28,1300 3600,1300 3562.01,1337.99 R2.2
NetR4_2: R4.2 U5.A5 | length 526.9
  Top Layer w15: R4.2 700,3400 v1(720.08,3420.08) ; U5.A5 749.21,3627.53 748.81,3627.93 748.81,3676.94 v1(750.46,3678.59)
  Bottom Layer w15: v1(720.08,3420.08) 700,3440.16 700,3495.24 641.76,3553.48 641.76,3666.94 654.63,3679.81 749.25,3679.81 v1(750.46,3678.59)
NetR5_2: R5.2 U5.B5 | length 415.5
  Top Layer w12: U5.B5@631.01,3612.7 U5.B5
  Top Layer w15: R5.2 400,3400 481.63,3481.63 599.38,3481.63 631.01,3513.25 U5.B5@631.01,3612.7
NetR6_1: R6.1 U8.6 | length 386.4
  Top Layer w15: R6.1@1336.08,3598.09 R6.1
  Top Layer w20: U8.6@1099.94,3498.76 1099.94,3471.45 1111.65,3459.73 1244.88,3459.73 1270.68,3485.53 1270.68,3584.69 1284.08,3598.09 R6.1@1336.08,3598.09
NetR7_1: R7.1 U8.4 | length 390.1
  Top Layer w20: U8.4@1174.84,3498.85 1174.84,3566.68 1188.1,3579.94 1189.86,3579.94 v1(1190.81,3580.89) ; v1@1261.08,3400 R7.1
  Bottom Layer w20: v1(1190.81,3580.89) 1213.7,3580.89 1226.88,3567.71 1226.88,3434 v1(1260.98,3399.9)
NetR8_2: R8.2 U10.18 | length 669.9
  Top Layer w20: U10.18 296.93,725 333.64,688.29 333.64,355.73 427.36,262.01 R8.2
NetR9_2: R9.2 U11.18 | length 624.8
  Top Layer w20: U11.18 3475,725 3500,700 3500,211.72 3488.28,200 R9.2
NetU2_24: U2.24 U3.1 | length 4140.8
  Top Layer w20: v1(200,1600) U2.24 ; U3.1 3783.27,1616.73 v1(3800,1600)
  Bottom Layer w20: v1(200,1600) 200,1441 241,1400 3600,1400 v1(3800,1600)
NetU10_24: U10.24 U11.1 | length 3901.2
  Top Layer w20: v1(215.84,340.26) 216.73,341.15 U10.24 ; v1(3600,300) 3658.27,300 3756.92,398.65 3756.92,423.39 3758.54,425 U11.1
  Bottom Layer w20: v1(215.84,340.26) 456.11,100 3400,100 v1(3600,300)
NRST: C15.2 P1.4 R10.1 U12.4 | length 2983.5
  Top Layer w20: U12.4 330,2970 360,3000 C15.2 742.52,2954.24 766.23,2930.53 v1(887.4,2930.53) ; v3(1898.04,2975) 2175,2975 v3(2200,3000) ; R10.1 v3(2500,3000) ; P1.4 2551.54,3389.41 2551.54,3348.46 v1(2600,3300)
  Bottom Layer w20: v1(887.4,2930.53) 1853.57,2930.53 v3(1898.04,2975) ; v3(2200,3000) 2228.47,3000 2283.59,2944.87 2444.87,2944.87 v3(2500,3000) 2600,3100 v1(2600,3300)
RX: U9.3 U12.2 | length 2403.2
  Top Layer w20: v1(252.53,2797.1) 253.49,2798.06 256.74,2798.06 270,2811.32 U12.2 ; v1(1614.27,3582.69) 1615.62,3582.69 1623.31,3575 U9.3
  Bottom Layer w20: v1(252.53,2797.1) 200,2849.63 200,3400 510.14,3710.14 1487.31,3710.14 1614.27,3583.19 v1(1614.27,3582.69)
SCK: U4.2 U12.15 | length 1358.7
  Top Layer w20: U12.15@388.95,3111.05 v1(388.95,3253.32) ; v1(905.67,3170.94) 907.02,3170.94 909.52,3168.44 911.62,3168.44 1000,3080.06 1000,2711.72 1011.72,2700 1088.28,2700 1100,2711.72 U4.2
  Bottom Layer w20: v1(388.95,3253.32) 404.99,3269.36 810.7,3269.36 903.17,3176.9 903.17,3174.79 905.67,3172.29 v1(905.67,3170.94)
SCK_H: U2.13 U3.13 U4.4 U10.13 U11.13 | length 7382.7
  Top Layer w20: U2.13 v1(300,2300) 391.83,2208.17 391.83,1664.94 418.52,1638.26 418.52,1018.52 375,975 U10.13 ; U4.4 1151.77,2848.23 1200,2800 1200,2711.72 1168.71,2680.43 v1(1136.26,2680.43) ; v1(3400,2400) 3416.73,2383.27 ; U11.13 3475,975 3500,1000 3700,1000 3758.27,1058.27 3758.27,1529.99 3574.34,1713.92 3574.34,1722.45 3547.71,1749.08 3547.71,2100.29 3600,2152.58 3600,2200 3416.73,2383.27 ; U3.13 3416.73,2383.27
  Bottom Layer w20: v1@300.6,2300 547.61,2547.01 1035.29,2547.01 1100,2611.72 1100,2668.71 1111.72,2680.43 v1(1136.26,2680.43) 1215.63,2601.06 1562.4,2601.06 1589.37,2574.09 2681.31,2574.09 2707.11,2599.89 3246.81,2599.89 3400,2446.7 v1(3400,2400)
SWIM: P1.2 U12.18 | length 2907.6
  Top Layer w20: U12.18 298.86,3111.14 298.86,3156.73 287.14,3168.44 278.53,3168.44 266.82,3180.16 266.82,3288.28 278.53,3300 400,3300 623.18,3076.82 v1(760.76,3076.82) ; P1.2 2351.54,3389.41 2351.54,3348.46 v1(2400,3300)
  Bottom Layer w20: v1(760.76,3076.82) 1676.82,3076.82 1800,3200 2100,3200 2291.72,3008.28 2308.28,3008.28 2400,3100 v1(2400,3300)
TX: U9.2 U12.3 | length 2757.4
  Top Layer w20: v1(283.55,2761.95) 300,2778.4 U12.3 ; v1(1611.62,3686.03) 1611.62,3638.38 1625,3625 U9.2
  Bottom Layer w20: v1(283.55,2761.95) 262.28,2740.68 171.04,2740.68 100,2811.72 100,3400 445.23,3745.23 1552.41,3745.23 v1(1611.62,3686.03)
А1: DS1.13 U2.14 | length 2288.1
  Top Layer w20: U2.14 201.24,2251.24 v1(289.26,2251.24)
  Bottom Layer w20: v1(289.26,2251.24) 315.9,2251.24 564.25,2499.59 600.41,2499.59 600.81,2500 1600,2500 1600.41,2499.59 1808.21,2499.59 1900,2407.81 1900,2120.78 1829.22,2050 DS1.13
А1_2: DS2.13 U3.14 | length 1177.8
  Top Layer w20: v1(3342.19,2293.58) 3342.02,2293.4 3342.02,2236.72 3353.73,2225 U3.14
  Bottom Layer w20: DS2.13 2950,2050 2900,2100 2900,2405.89 2956.72,2462.62 3188.57,2462.62 3341.24,2309.95 3341.24,2294.53 v1(3342.19,2293.58)
А1_3: DS3.13 U10.14 | length 2101.3
  Top Layer w20: U10.14 289.37,925 v1(289.88,925.51)
  Bottom Layer w20: v1(289.88,925.51) 289.88,969.47 320.41,1000 365.32,1000 596.03,1230.71 1384.98,1230.71 1713.18,902.5 1784.68,902.5 1850.94,836.23 1850.94,777.16 1823.78,750 DS3.13
А1_4: DS4.13 U11.14 | length 801.4
  Top Layer w20: v1(3338.76,924.17) 3339.59,925 U11.14
  Bottom Layer w20: DS4.13 2989.25,750 2977.54,761.72 2977.54,988.28 2989.25,1000 3265.82,1000 3338.76,927.06 v1(3338.76,924.17)
А2: DS1.3 U2.16 | length 648.8
  Top Layer w20: U2.16 326.78,2150 338.5,2138.28 v1(338.5,2132.74)
  Bottom Layer w20: v1(338.5,2132.74) 338.5,2134.92 353.58,2150 DS1.3
А2_2: DS2.3 U3.16 | length 1399.5
  Top Layer w20: v1(3335.51,2124.91) 3335.6,2125 U3.16
  Bottom Layer w20: DS2.3 2778.82,2150 2927.44,2001.38 3211.99,2001.38 v1(3335.51,2124.91)
А2_3: DS3.3 U10.16 | length 623.8
  Top Layer w20: U10.16 217,824.74 v1(288.9,824.74)
  Bottom Layer w20: v1(288.9,824.74) 289.64,825.47 291.85,825.47 316.37,850 DS3.3
А2_4: DS4.3 U11.16 | length 1792.3
  Top Layer w20: U11.16 3510.81,825 v1(3511.03,825.22)
  Bottom Layer w20: DS4.3 2250,850 2575,1175 3225,1175 3511.03,888.97 v1(3511.03,825.22)
А3: DS1.4 U2.20 | length 694.6
  Top Layer w20: U2.20 200.57,1949.43 v1(271.8,1949.43)
  Bottom Layer w20: v1(271.8,1949.43) 272.38,1949.43 400.4,2077.45 463.75,2077.45 491.2,2050 DS1.4
А3_2: DS2.4 U3.20 | length 1359.2
  Top Layer w20: v1(3333.92,1924.71) 3416.44,1924.71 U3.20
  Bottom Layer w20: DS2.4 2750,2050 2900,1900 3309.21,1900 v1(3333.92,1924.71)
А3_3: DS3.4 U10.20 | length 684.7
  Top Layer w20: U10.20 217.03,624.7 v1(297.6,624.7)
  Bottom Layer w20: v1(297.6,624.7) 304.5,624.7 453.23,773.43 795.79,773.43 819.22,750 DS3.4
А3_4: DS4.4 U11.20 | length 1360.4
  Top Layer w20: v1(3333.64,626.44) 3335.08,625 U11.20
  Bottom Layer w20: DS4.4 2850,750 3000,600 3307.2,600 v1(3333.64,626.44)
А4: DS1.10 U2.23 | length 1873.8
  Top Layer w20: U2.23 266.42,1800 v1(267.01,1800.59)
  Bottom Layer w20: v1(267.01,1800.59) 267.01,1676.88 447.53,1496.36 1267.07,1496.36 1520.71,1750 DS1.10
А4_2: DS2.10 U3.23 | length 357.1
  Top Layer w20: v1(3331.71,1768.83) 3337.88,1775 U3.23
  Bottom Layer w20: DS2.10 3312.88,1750 v1(3331.71,1768.83)
А4_3: DS3.10 U10.23 | length 2157.5
  Top Layer w20: U10.23 217.7,474.03 v1(293.3,474.03)
  Bottom Layer w20: v1(293.3,474.03) 293.3,473.61 292.87,473.18 292.87,407.13 518.65,181.35 1834.62,181.35 1877.92,224.65 1877.92,422.08 1850,450 DS3.10
А4_4: DS4.10 U11.23 | length 357.1
  Top Layer w20: v1(3328.5,474.99) U11.23
  Bottom Layer w20: DS4.10 3303.5,450 v1(3328.5,474.99)
А5: DS1.6 U2.22 | length 813
  Top Layer w20: U2.22 200.38,1849.62 323.91,1849.62 v1(324.76,1848.77) ; v1(461.13,1736.43) 462.09,1735.48 462.09,1723.43 485.52,1700 v1(600,1700)
  Bottom Layer w20: v1(324.76,1848.77) 325.61,1849.62 346.96,1849.62 460.15,1736.43 v1(461.13,1736.43) ; v1(600,1700) 600,1786.99 663.01,1850 DS1.6
А5_2: DS2.6 U3.22 | length 1317.8
  Top Layer w20: v1(3332.57,1823.66) 3333.06,1824.15 3415.88,1824.15 U3.22
  Bottom Layer w20: DS2.6 2180,1800 3308.91,1800 v1(3332.57,1823.66)
А5_3: DS3.6 U10.22 | length 656
  Top Layer w20: U10.22@221.04,527.79 223.94,524.88 v1(296.52,524.88) ; v1(364.45,512.11) 365.61,513.27 365.61,525.46 v1(411.48,571.33)
  Bottom Layer w20: v1(296.52,524.88) 351.68,524.88 v1(364.45,512.11) ; v1(411.48,571.33) 649.54,571.33 670.87,550 DS3.6
А5_4: DS4.6 U11.22 | length 1671.2
  Top Layer w20: v1(3329.27,526.23) 3330.5,525 U11.22
  Bottom Layer w20: DS4.6 2126.35,553.65 2048.58,553.65 2036.86,565.37 2036.86,636.86 2100,700 2800,700 3000,500 3303.04,500 v1(3329.27,526.23)
А6: DS1.11 U2.21 | length 1972.9
  Top Layer w20: U2.21 290.25,1900 v1(291.1,1900.85)
  Bottom Layer w20: v1(291.1,1900.85) 291.1,1814.24 294.72,1810.62 294.72,1699 464.03,1529.69 1265.05,1529.69 1585.36,1850 DS1.11
А6_2: DS2.11 U3.21 | length 357.1
  Top Layer w20: v1(3332.49,1871.08) 3336.41,1875 U3.21
  Bottom Layer w20: DS2.11 3311.41,1850 v1(3332.49,1871.08)
А6_3: DS3.11 U10.21 | length 2329.1
  Top Layer w20: U10.21 294.14,575 v1(294.56,574.58)
  Bottom Layer w20: v1(294.56,574.58) 294.93,574.21 357.09,574.21 403.66,527.64 403.66,374.35 560.37,217.63 1799.07,217.63 1843.11,261.68 1843.11,388.28 1831.4,400 1711.72,400 1700,411.72 1700,480 DS3.11
А6_4: DS4.11 U11.21 | length 357.1
  Top Layer w20: v1(3331.25,571.19) 3335.06,575 U11.21
  Bottom Layer w20: DS4.11 3082.18,550 3103.36,571.19 v1(3331.25,571.19)
А7: DS1.15 U2.15 | length 2057.4
  Top Layer w20: U2.15 v1(300,2200)
  Bottom Layer w20: v1(300,2200) 308.93,2200 519.36,2410.43 531.57,2410.43 595.73,2474.59 1797.86,2474.59 1873.73,2398.72 1873.73,2273.73 1850,2250 DS1.15
А7_2: DS2.15 U3.15 | length 378
  Top Layer w20: v1(3332.75,2174.71) 3416.44,2174.71 U3.15
  Bottom Layer w20: DS2.15 3145.29,2174.71 v1(3332.75,2174.71)
А7_3: DS3.15 U10.15 | length 2182.6
  Top Layer w20: v1(141.76,874.74) 142.02,875 U10.15
  Bottom Layer w20: v1(141.76,874.74) 139.58,876.93 139.58,1188.62 216.25,1265.29 1398.88,1265.29 1714.17,950 DS3.15
А7_4: DS4.15 U11.15 | length 378.1
  Top Layer w20: v1(3334.74,874.61) 3335.14,875 U11.15
  Bottom Layer w20: DS4.15 3144.85,875.15 3334.2,875.15 v1(3334.74,874.61)
А8: DS1.16 U2.17 | length 1777.5
  Top Layer w20: U2.17 v1(300,2100)
  Bottom Layer w20: v1(300,2100) 300,2148.77 536.66,2385.43 541.92,2385.43 597.45,2440.96 1559.48,2440.96 1650.44,2350 DS1.16
А8_2: DS2.16 U3.17 | length 645.1
  Top Layer w20: v1(3331.58,2040.96) 3331.58,2049.42 3357.16,2075 U3.17
  Bottom Layer w20: DS2.16 3196.56,2223.44 3337.94,2223.44 3380.64,2180.74 3380.64,2114.55 3331.58,2065.49 v1(3331.58,2040.96)
А8_3: DS3.16 U10.17 | length 2325.4
  Top Layer w20: v1(138.64,776.23) 139.87,775 U10.17
  Bottom Layer w20: v1(138.64,776.23) 107.68,807.18 107.68,1204.94 202.74,1300 1448.18,1300 1698.18,1050 DS3.16
А8_4: DS4.16 U11.17 | length 1017.8
  Top Layer w20: v1(3332.38,769.78) 3337.6,775 U11.17
  Bottom Layer w20: DS4.16 2950,1050 2900,1000 2900,735.36 2935.36,700 3164.64,700 3234.12,769.48 3332.08,769.48 v1(3332.38,769.78)
pads on no net: U1.4 U5. U5.A8 U5.B8 U9.7 U9.8 U9.9 U9.10 U9.11 U9.12 U9.13 U9.14 U9.15 U11.24 U12.1 U12.5 U12.6 U12.11 U12.12 U12.13 U12.17 U12.19 U12.20

## Polygon pours and split planes (outlines as drawn)
GND on Bottom Layer "GND_L02_P003" (solid, pour order 3): 100.42,1.7 3779.95,1.7 ccw(c3779.95,119.81) 3898.06,119.81 3898.06,3741.47 ccw(c3779.06,3740.59) 3779.95,3859.58 118.53,3859.58 ccw(c118.48,3741.52) 0.42,3741.47 0.42,101.7 ccw(c100.38,101.66)
GND on Top Layer "GND_L01_P002" (solid, pour order 2): 100,0 3779.53,0 ccw(c3779.53,118.11) 3897.64,118.11 3897.64,3739.77 ccw(c3778.64,3738.88) 3779.53,3857.88 118.11,3857.88 ccw(c118.06,3739.82) 0,3739.77 0,100 ccw(c99.96,99.96)

## Keep-outs
Keep-Out Layer:
  circle w61.02: c175,171.14 r92.52
  circle w61.02: c3723.61,171.14 r92.52
  circle w61.02: c175,3686.73 r92.52
  circle w61.02: c3713.62,3676.73 r92.52
  lines w10: 0,118.11 ccw(c118.11,118.11) 118.11,0 3779.53,0 ccw(c3779.53,118.11) 3897.64,118.11 3897.64,3740.16 ccw(c3779.53,3740.16) 3779.53,3858.27 118.11,3858.27 ccw(c118.11,3740.16) 0,3740.16 0,230 0,220 0,118.11

## Silkscreen, mask and mechanical layers (free items; w line width, h text height)
Top Overlay:
  text "3V3" at 2290,3110 h50 r90
  text "SWIM" at 2390,3110 h50 r90
  text "GND" at 2490,3110 h50 r90
  text "NRST" at 2590,3110 h50 r90
Bottom Overlay:
  text "Shylo Max" at 2185,141.66 h80

## Text inside footprints (layer, text, board x,y; h text height)
U5: Top 3D Body "PCB EDGE" at 487.4,3898.43 h16 r180